# EAGLE board zxuno_bus_v2_for_zxuno_v41 (EAGLE 7.2.0)
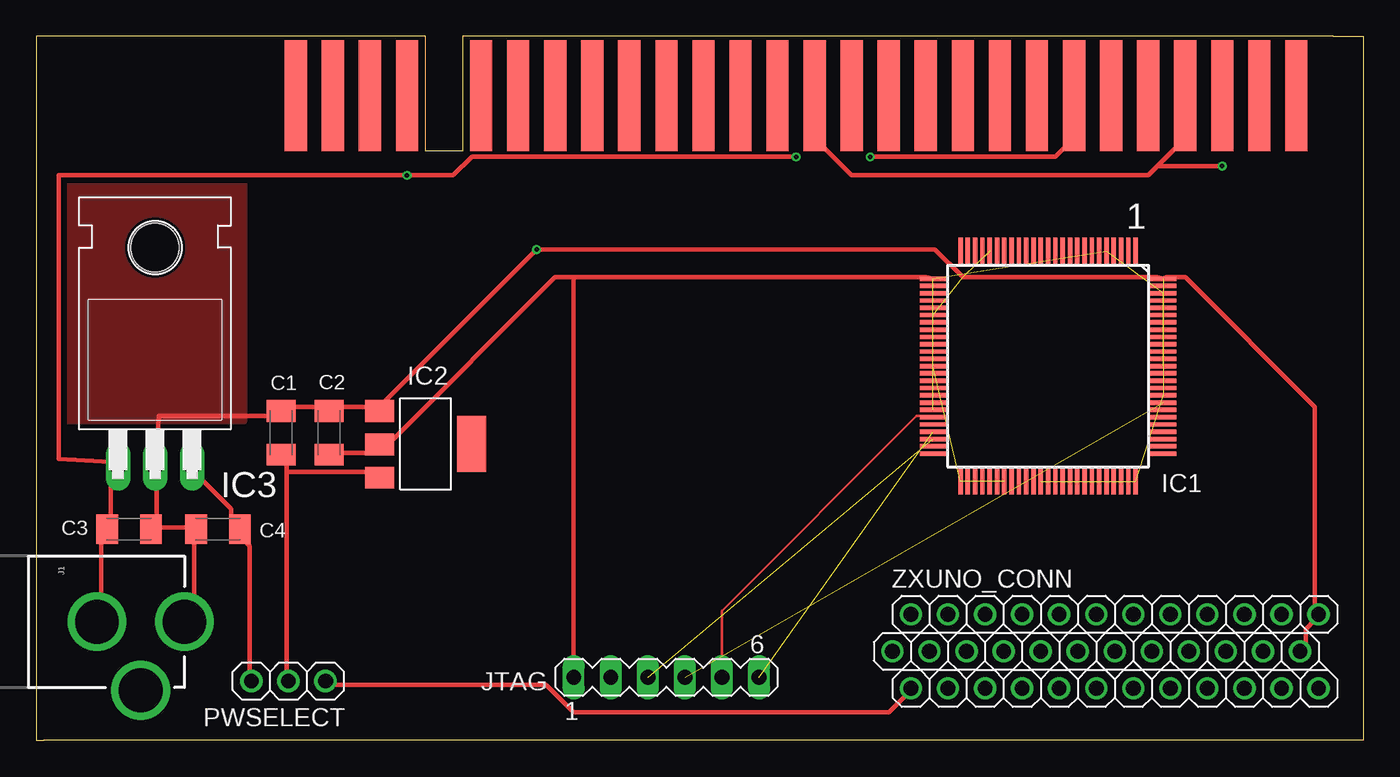
[diagram p0: board, top side]
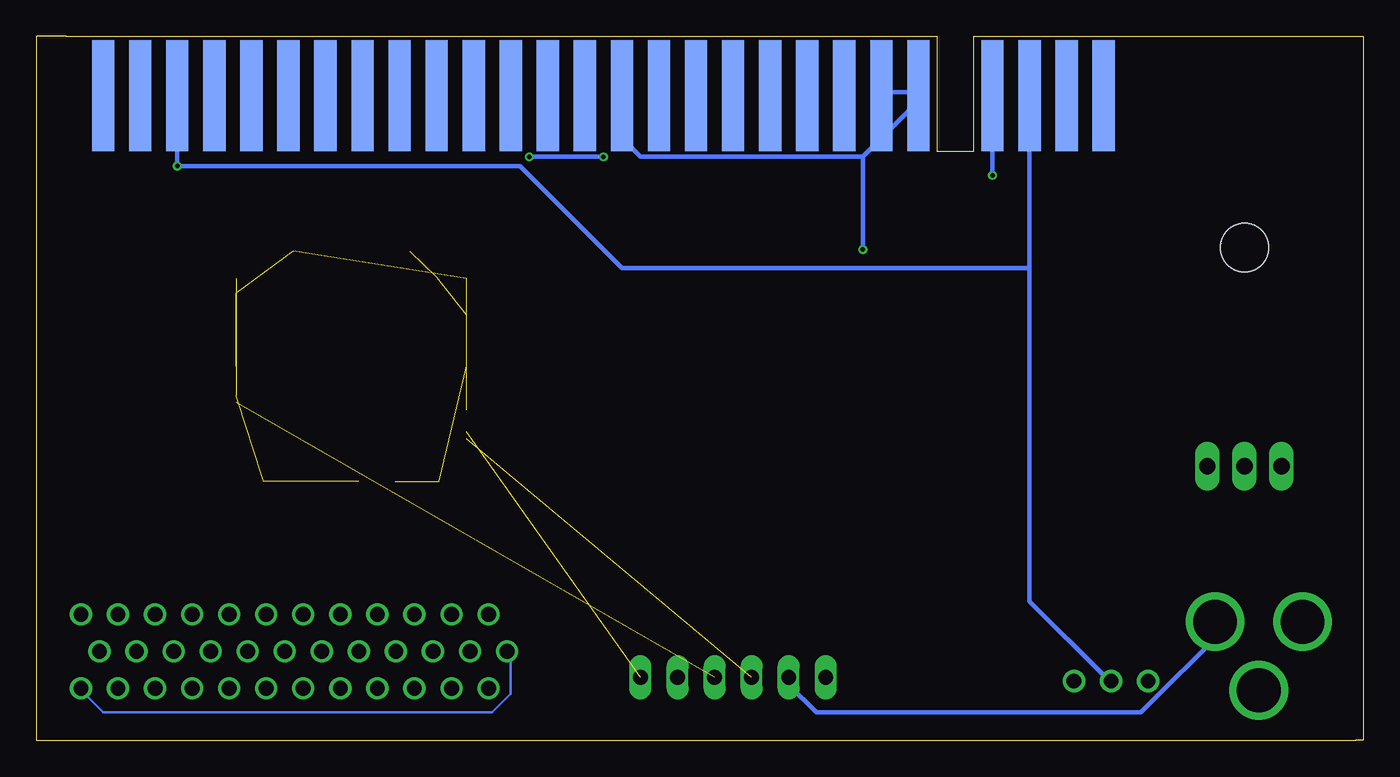
[diagram p1: board, bottom side, seen from below]

Size 90.93 x 48.26 mm. Coordinates in mm from the lower left corner, seen from the top.
Outline: 0,0.02 0,48.26 15.24,48.26
Outline: 88.9,48.26 90.93,48.26 90.93,0 89.41,0 0.51,0 0,0
Copper layers (1*16): Top 0.035mm / dielectric 1.5mm / Bottom 0.035mm
Design rules "dirt_cheap_dirty_boards.v1": minimum track width 5mil, minimum drill 12mil, track to track 5mil, track to pad 5mil, pad to pad 5mil, via to via 5mil, smd to smd 0mil, copper to edge 10mil, drill to drill 10mil, minimum pad ring 10mil, minimum via ring 6mil, stop-mask expansion 2mil, vias tented up to drill 25mil, thermal gap 10mil
Net classes: 0 default: width 0.178 mm, clearance 0.178 mm; 1 power: width 0.305 mm, clearance 0.178 mm to class 0, clearance 0.229 mm

## Footprints (pad centres in the part's own frame; a part is rotated, then mirrored left to right if it is on the bottom)
C1206K = smd 1.5 x 2: 1 -1.5,0; 2 1.5,0
XC_XC-TQ100 = smd 1.8 x 0.3: 1 -7.9,6; 2 -7.9,5.5; 3 -7.9,5; 4 -7.9,4.5; 5 -7.9,4; 6 -7.9,3.5; 7 -7.9,3; 8 -7.9,2.5; 9 -7.9,2; 10 -7.9,1.5; 11 -7.9,1; 12 -7.9,0.5; 13 -7.9,0; 14 -7.9,-0.5; 15 -7.9,-1; 16 -7.9,-1.5; 17 -7.9,-2; 18 -7.9,-2.5; 19 -7.9,-3; 20 -7.9,-3.5; 21 -7.9,-4; 22 -7.9,-4.5; 23 -7.9,-5; 24 -7.9,-5.5; 25 -7.9,-6; 51 7.9,-6; 52 7.9,-5.5; 53 7.9,-5; 54 7.9,-4.5; 55 7.9,-4; 56 7.9,-3.5; 57 7.9,-3; 58 7.9,-2.5; 59 7.9,-2; 60 7.9,-1.5; 61 7.9,-1; 62 7.9,-0.5; 63 7.9,0; 64 7.9,0.5; 65 7.9,1; 66 7.9,1.5; 67 7.9,2; 68 7.9,2.5; 69 7.9,3; 70 7.9,3.5; 71 7.9,4; 72 7.9,4.5; 73 7.9,5; 74 7.9,5.5; 75 7.9,6 | smd 0.3 x 1.8: 26 -6,-7.9; 27 -5.5,-7.9; 28 -5,-7.9; 29 -4.5,-7.9; 30 -4,-7.9; 31 -3.5,-7.9; 32 -3,-7.9; 33 -2.5,-7.9; 34 -2,-7.9; 35 -1.5,-7.9; 36 -1,-7.9; 37 -0.5,-7.9; 38 0,-7.9; 39 0.5,-7.9; 40 1,-7.9; 41 1.5,-7.9; 42 2,-7.9; 43 2.5,-7.9; 44 3,-7.9; 45 3.5,-7.9; 46 4,-7.9; 47 4.5,-7.9; 48 5,-7.9; 49 5.5,-7.9; 50 6,-7.9; 76 6,7.9; 77 5.5,7.9; 78 5,7.9; 79 4.5,7.9; 80 4,7.9; 81 3.5,7.9; 82 3,7.9; 83 2.5,7.9; 84 2,7.9; 85 1.5,7.9; 86 1,7.9; 87 0.5,7.9; 88 0,7.9; 89 -0.5,7.9; 90 -1,7.9; 91 -1.5,7.9; 92 -2,7.9; 93 -2.5,7.9; 94 -3,7.9; 95 -3.5,7.9; 96 -4,7.9; 97 -4.5,7.9; 98 -5,7.9; 99 -5.5,7.9; 100 -6,7.9
SOT223 = smd 1.499 x 2.007: 1 -2.261,-3.15; 2 0.025,-3.15; 3 2.311,-3.15 | smd 3.81 x 2.007: 4 0,3.15
TO220H = drill 1.118 long: 1 -2.54,-10.16; 2 0,-10.16; 3 2.54,-10.16 | hole 3.302: 0,4.826
POWER_JACK_PTH = drill 2.997: GND 0,7.7; GNDBREAK 4.7,10.7; PWR 0,13.7
MA06-1 = drill 1.016 long: 1 -6.35,0; 2 -3.81,0; 3 -1.27,0; 4 1.27,0; 5 3.81,0; 6 6.35,0
1X03 = drill 1.016: 1 -2.54,0; 2 0,0; 3 2.54,0
CONECTOR_LADO_SPECTRUM = smd 7.62 x 1.524: P$1 2.54,2.54; P$2 2.54,0; P$3 2.54,-2.54; P$4 2.54,-5.08; P$5 2.54,-10.16; P$6 2.54,-12.7; P$7 2.54,-15.24; P$8 2.54,-17.78; P$9 2.54,-20.32; P$10 2.54,-22.86; P$11 2.54,-25.4; P$12 2.54,-27.94; P$13 2.54,-30.48; P$14 2.54,-33.02; P$15 2.54,-35.56; P$16 2.54,-38.1; P$17 2.54,-40.64; P$18 2.54,-43.18; P$19 2.54,-45.72; P$20 2.54,-48.26; P$21 2.54,-50.8; P$22 2.54,-53.34; P$23 2.54,-55.88; P$24 2.54,-58.42; P$25 2.54,-60.96; P$26 2.54,-63.5; P$27 2.54,-66.04 | smd 7.62 x 1.524 bottom: P$28 2.54,2.54; P$29 2.54,0; P$30 2.54,-2.54; P$31 2.54,-5.08; P$32 2.54,-10.16; P$33 2.54,-12.7; P$34 2.54,-15.24; P$35 2.54,-17.78; P$36 2.54,-20.32; P$37 2.54,-22.86; P$38 2.54,-25.4; P$39 2.54,-27.94; P$40 2.54,-30.48; P$41 2.54,-33.02; P$42 2.54,-35.56; P$43 2.54,-38.1; P$44 2.54,-40.64; P$45 2.54,-43.18; P$46 2.54,-45.72; P$47 2.54,-48.26; P$48 2.54,-50.8; P$49 2.54,-53.34; P$50 2.54,-55.88; P$51 2.54,-58.42; P$52 2.54,-60.96; P$53 2.54,-63.5; P$54 2.54,-66.04
ZXUNO_CONNECTOR = drill 1.016: 3.3V@1 -13.97,0; 3.3V@2 15.24,-2.54; 5V -12.7,-2.54; GND@1 15.24,2.54; GND@2 13.97,0; NC@1 12.7,2.54; P6 -12.7,2.54; P7 -10.16,-2.54; P8 -11.43,0; P9 -10.16,2.54; P10 -7.62,-2.54; P11 -8.89,0; P12 -7.62,2.54; P13 -5.08,-2.54; P14 -6.35,0; P15 -5.08,2.54; P16 -2.54,-2.54; P17 -3.81,0; P18 -2.54,2.54; P19 0,-2.54; P20 -1.27,0; P21 0,2.54; P22 2.54,-2.54; P23 1.27,0; P24 2.54,2.54; P25 5.08,-2.54; P26 3.81,0; P27 5.08,2.54; P28 7.62,-2.54; P29 6.35,0; P30 7.62,2.54; P31 10.16,-2.54; P32 8.89,0; P33 10.16,2.54; P34 12.7,-2.54; P35 11.43,0

## Placement (x,y rotation side)
C1  [C1206K]  16.76,21.08 90 top
C2  [C1206K]  20.07,21.08 90 top
C3  [C1206K]  6.35,14.48 0 top
C4  [C1206K]  12.45,14.48 180 top
IC1  XC_XC95144XL_TQ100  [XC_XC-TQ100]  69.34,25.65 270 top
IC2  REG1117  [SOT223]  26.67,20.32 270 top
IC3  7805T  [TO220H]  8.13,28.96 0 top
J1  POWER_JACKPTH  [POWER_JACK_PTH]  -3.56,8.13 270 top
JTAG  [MA06-1]  43.18,4.32 0 top
PWSELECT  [1X03]  17.27,4.06 180 top
U$1  CONECTOR_EDGE_LADO_SPECTRUM  [CONECTOR_LADO_SPECTRUM]  20.32,41.66 90 top
ZXUNO_CONN  ZXUNO_CONNECTOR  [ZXUNO_CONNECTOR]  72.64,6.1 0 top

## Library data of the parts
C1-C4 = rcl
IC1 = xilinx
IC2 = burr-brown
IC3 = linear
J1 = SparkFun
JTAG = con-lstb
PWSELECT = adafruit
U$1 = zx_spectrum
ZXUNO_CONN = zxuno

## Nets
3.3V: ZXUNO_CONN.3.3V@1 ZXUNO_CONN.3.3V@2
+3V3 [power]: C2.1 IC1.5 IC1.26 IC1.38 IC1.51 IC1.57 IC1.88 IC1.98 IC2.2 JTAG.1
+5V [power]: C1.1 IC2.3 PWSELECT.2 U$1.P$14 U$1.P$24 U$1.P$30 U$1.P$52
+12V [power]: C3.1 IC3.1 J1.GND U$1.P$21 U$1.P$31
/INT: U$1.P$12
/IORQ: U$1.P$16
/M1: U$1.P$23
/MREQ: U$1.P$15
/NMI: U$1.P$13
/RD: U$1.P$17
/RESET: U$1.P$46
/WAIT: U$1.P$20
/WR: U$1.P$18
/Y: U$1.P$42
A0: U$1.P$35
A1: U$1.P$36
A2: U$1.P$37
A3: U$1.P$38
A4: U$1.P$50
A5: U$1.P$49
A6: U$1.P$48
A7: U$1.P$47
A8: U$1.P$25
A9: U$1.P$53
A10: U$1.P$26
A11: U$1.P$54
A12: U$1.P$29
A13: U$1.P$2
A14: U$1.P$28
A15: U$1.P$1
D0: U$1.P$5
D1: U$1.P$6
D2: U$1.P$7
D3: U$1.P$10
D4: U$1.P$11
D5: U$1.P$9
D6: U$1.P$8
D7: U$1.P$3
GND [power]: C1.2 C2.2 C3.2 C4.2 IC1.21 IC1.31 IC1.44 IC1.62 IC1.69 IC1.75 IC1.84 IC1.100 IC2.1 IC3.2 J1.PWR JTAG.2 U$1.P$32 U$1.P$33 U$1.P$40 ZXUNO_CONN.GND@1 ZXUNO_CONN.GND@2
IORQGE: U$1.P$39
N$1 [power]: PWSELECT.1 ZXUNO_CONN.5V
N$3 [power]: C4.1 IC3.3 PWSELECT.3
ROMCS: U$1.P$51
SPCLK: U$1.P$34
TCK: IC1.48 JTAG.3
TDI: IC1.45 JTAG.5
TDO: IC1.83 JTAG.4
TMS: IC1.47 JTAG.6

## Tracks (layer width: path | path; a pad name or v marks a point on that pad's centre or on a via)
3.3V
  Bottom 0.178: ZXUNO_CONN.3.3V@1 58.42,5.71 58.42,3.17 59.69,1.91 86.36,1.91 87.63,3.17 ZXUNO_CONN.3.3V@2
+3V3  (6 unrouted)
  Top 0.305: 36.83,31.75 35.56,31.75 24.13,20.32 IC2.2 23.5,19.68 20.32,19.68 C2.1 | 36.83,31.75 60.96,31.75 IC1.26 | 36.83,31.75 36.83,4.45 JTAG.1
+5V  (via drill 0.3)
  Top 0.305: 76.83,39.37 78.74,41.27 78.74,43.81 U$1.P$24 | 76.83,39.37 76.2,38.73 55.88,38.73 53.34,41.27 53.34,43.81 U$1.P$14 | 76.83,39.37 v81.28,39.37 | 17.14,18.41 17.14,4.45 PWSELECT.2 | 17.14,18.41 17.14,19.05 C1.1 | 17.14,18.41 23.5,18.41 IC2.3
  Bottom 0.305: U$1.P$52 81.28,43.81 v81.28,39.37 57.78,39.37 50.8,32.38 22.86,32.38 | 22.86,32.38 22.86,9.53 17.78,4.45 PWSELECT.2 | 22.86,32.38 22.86,43.81 U$1.P$30
+12V  (via drill 0.3)
  Top 0.305: J1.GND 4.45,8.26 4.45,13.97 C3.1 5.08,14.61 5.08,18.41 IC3.1 5.71,19.05 1.52,19.3 1.52,38.73 v25.4,38.73 28.57,38.73 29.84,40.01 v52.07,40.01 | v57.15,40.01 69.85,40.01 71.12,41.27 71.12,43.81 U$1.P$21
  Bottom 0.305: v25.4,38.73 25.4,43.81 U$1.P$31 | v52.07,40.01 v57.15,40.01
GND  (via drill 0.3)  (7 unrouted)
  Top 0.305: ZXUNO_CONN.GND@2 87,6.35 87,7.62 87.63,8.26 ZXUNO_CONN.GND@1 87.63,8.89 87.63,22.86 78.74,31.75 77.47,31.75 IC1.100 76.83,31.75 63.5,31.75 61.59,33.66 v34.29,33.66 23.5,22.86 | 23.5,22.86 20.32,22.86 C2.2 19.68,22.86 17.14,22.86 C1.2 16.51,22.23 8.38,22.23 8.26,19.05 IC3.2 8.26,18.41 8.26,14.61 | 23.5,22.86 IC2.1 23.5,22.86 | 8.26,14.61 10.79,14.61 C4.2 10.79,13.97 10.79,8.89 10.16,8.26 J1.PWR | 8.26,14.61 C3.2 8.26,14.61
  Bottom 0.305: U$1.P$33 33.02,44.45 30.48,44.45 U$1.P$32 30.48,43.81 34.29,40.01 | 34.29,40.01 49.53,40.01 50.8,41.27 50.8,43.81 U$1.P$40 | JTAG.2 39.37,3.81 37.47,1.91 15.24,1.91 9.53,7.62 J1.PWR | v34.29,33.66 34.29,40.01
  pour Top (isolate 0.406): 2.03,38.61 14.22,38.61 14.22,21.84 2.03,21.84
N$1
  Top 0.305: PWSELECT.1 20.32,3.81 34.92,3.81 36.83,1.91 58.42,1.91 59.69,3.17 ZXUNO_CONN.5V
N$3
  Top 0.305: IC3.3 10.79,18.41 13.34,15.88 13.34,14.61 C4.1 13.97,13.97 14.61,13.34 14.61,4.45 PWSELECT.3
TCK  (1 unrouted)
TDI
  Top 0.178: IC1.45 60.96,22.23 60.33,22.23 46.99,8.89 46.99,4.45 JTAG.5
TDO  (1 unrouted)
TMS  (1 unrouted)

## Text on the board
tPlace: 1